# Altium PCB PCB1.PcbDoc
Units mm, origin at the board's own origin, x right, y up, seen from the top; angles counter-clockwise.
Board outline 58.42 x 106.68 mm, 2 copper layers (Top Layer, Bottom Layer); 57 components, 47 nets, 185 pads, 8 vias.
Unrouted connection lines stored in the file: 18.
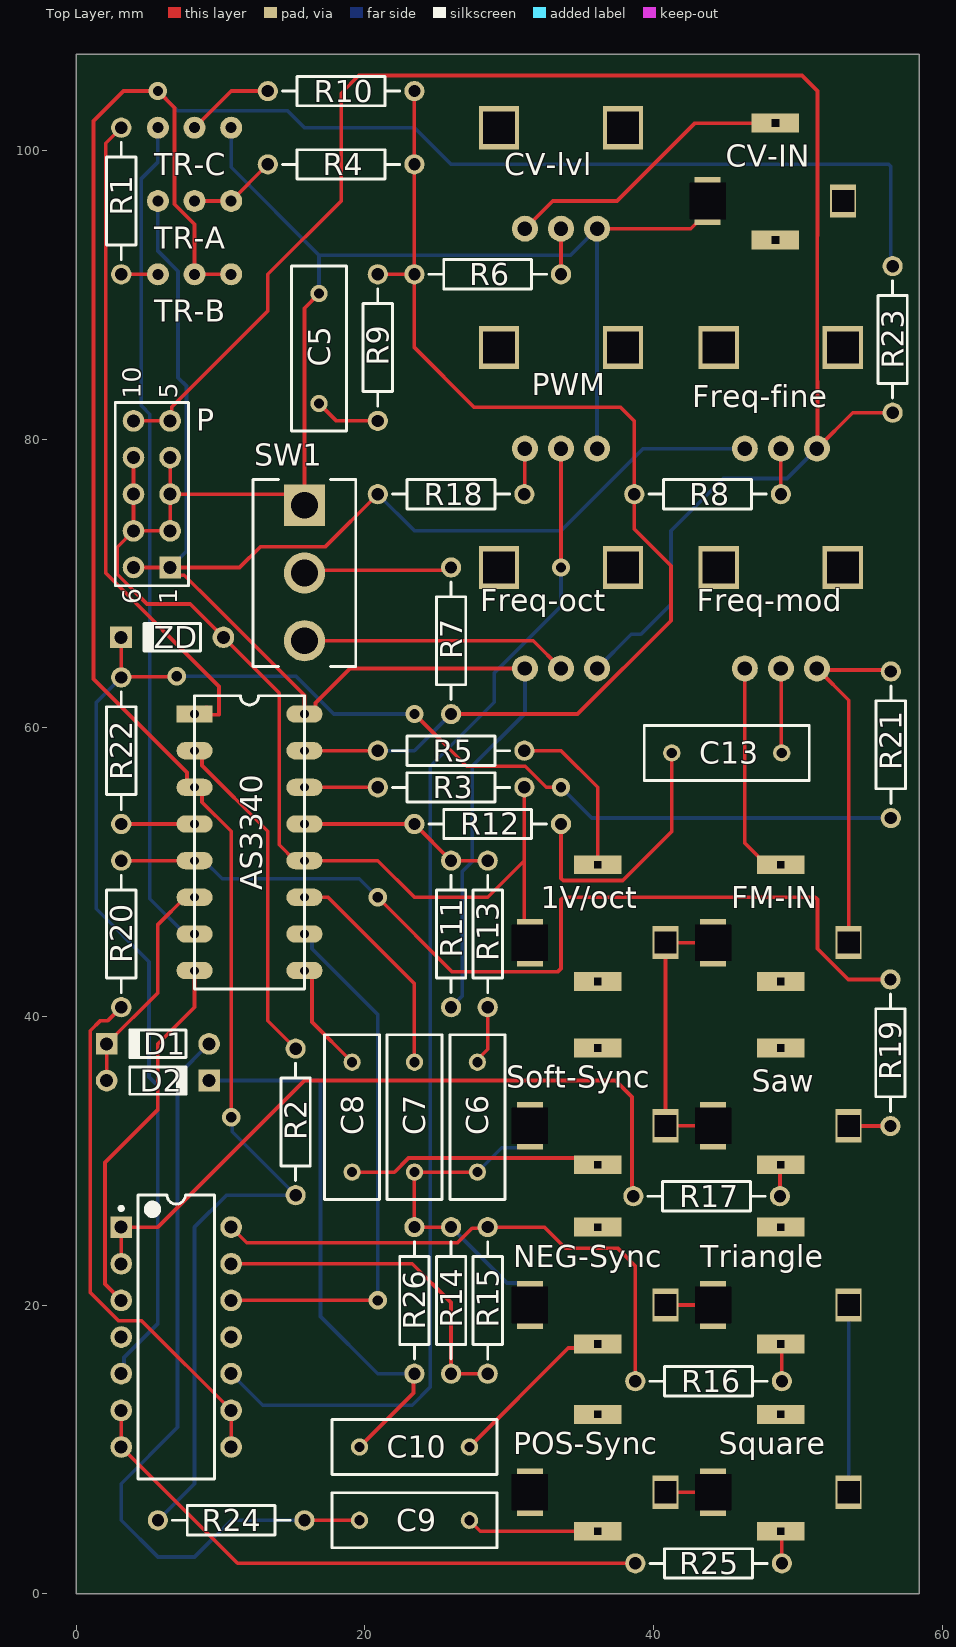
[diagram p0: Top Layer view]
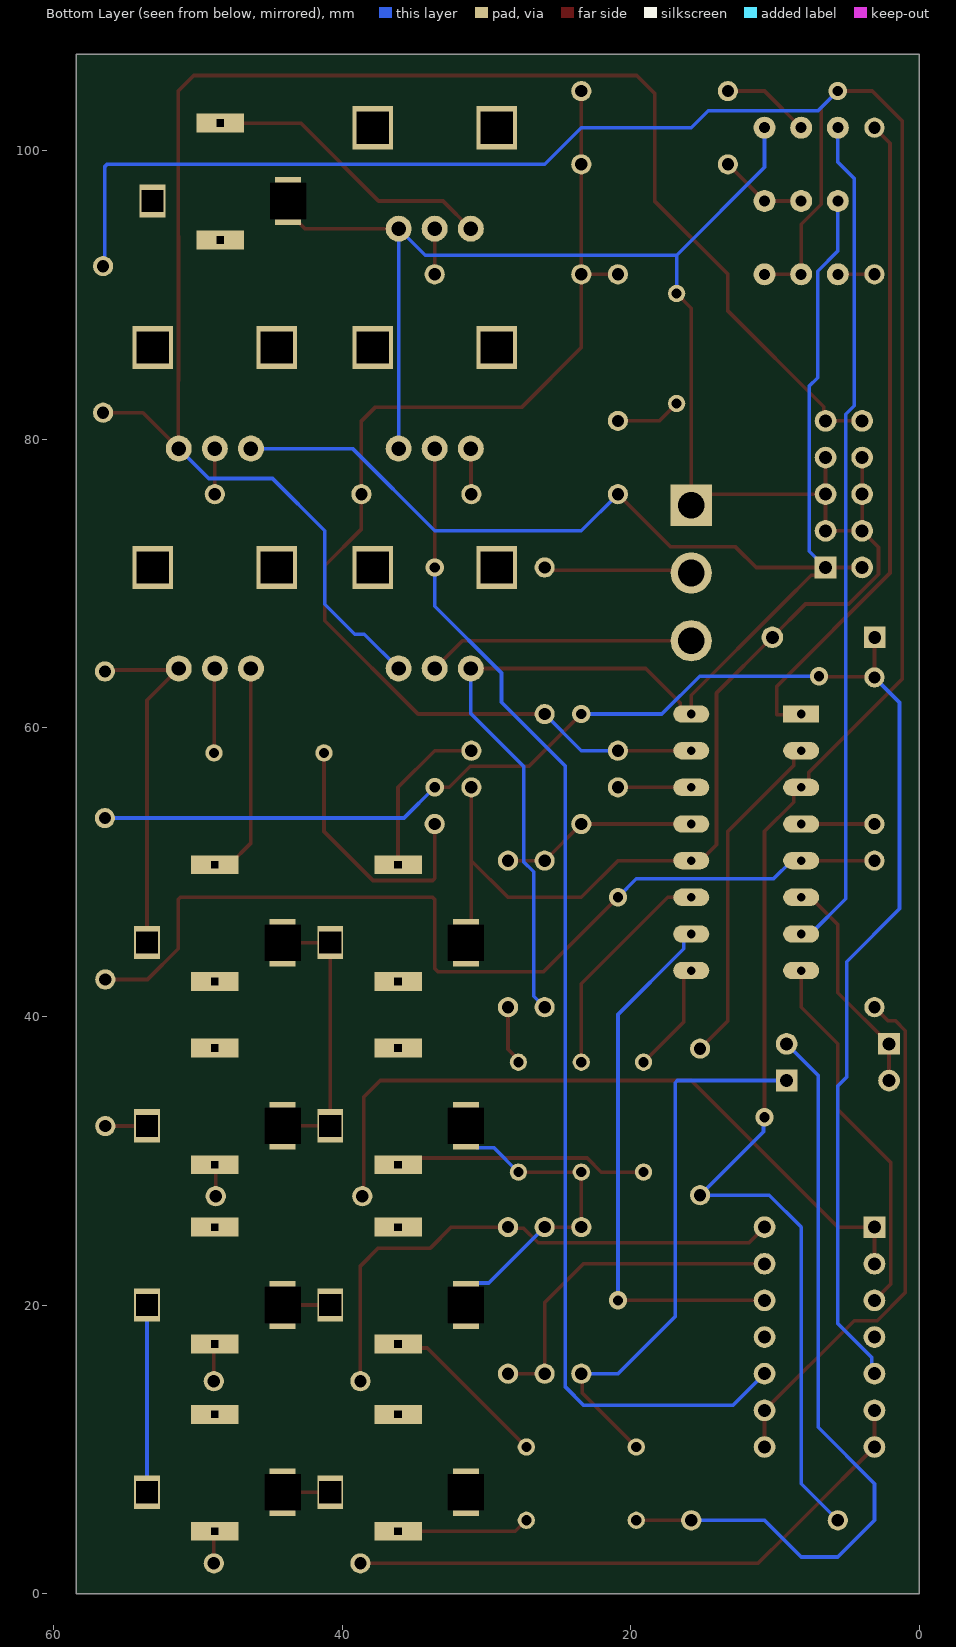
[diagram p1: Bottom Layer view, seen from below]

## Layer stack, top to bottom
Top Solder: solder mask 0.0102, Solder Resist, Dk 3.5
Top Layer: signal copper 0.0356
Dielectric 1: dielectric 0.32, FR-4, Dk 4.8
Bottom Layer: signal copper 0.0356
Bottom Solder: solder mask 0.0102, Solder Resist, Dk 3.5

## Board outline
0,0 58.42,0 58.42,106.68 0,106.68

## Design rules (kind name [scope] priority, off if disabled: settings)
Clearance [All] p1: gap=0.254 ignorepadtopadclearanceinfootprint=FALSE except(0: Arc-Hole Track-Hole SMDPad-Hole THPad-Hole Via-Hole Fill-Hole Poly-Hole Region-Hole Text-Hole)
PolygonConnect [All] p1: connectstyle=Relief reliefconductorwidth=0.254 reliefentries=4 polygonreliefangle="90 Angle" airgapwidth=0.254
RoomDefinition VCO_schematic [InComponentClass('VCO_schematic')] p1: confinementstyle=ConfineIn formatcopy=TRUE lockcomponents=FALSE outline 0,0 58.42,0 58.42,106.68 0,106.68
RoutingVias [All] p1: holewidth=0.711 width=1.27 viastyle="Through Hole" minholewidth=0.711 minwidth=1.27 maxholewidth=0.711 maxwidth=1.27
SolderMaskExpansion [All] p1: expansion=0.102 istentingtop=FALSE
Width [All] p1: maxlimit=0.254 minlimit=0.254 preferedwidth=0.254
30 further rules are at their usual default settings.

## Classes and differential pairs
component class VCO_schematic: 0 1V/oct AS3340 C5 C6 C7 C8 C9 C10 C13 CV-lvl D1 D2 FM-IN Freq-fine Freq-mod Freq-oct NEG-Sync P POS-Sync PWM R1 R2 R3 R4 R5 R6 R7 R8 R9 R10 R11 R13 R14 R15 R16 R17 R18 R19 R20 R21 R22 R23 R24 R25 R26 Saw Soft-Sync Square SW1 TR-A TR-B TR-C Triangle

## Components (designator, comment, footprint, x,y, rotation, side; value= is the part's Value field where it differs from the comment)
1V/oct "" PCBComponent_1#1 36.127,45.72 r0 top (schematic designator 1V/oct-IN)
AS3340 "AS3340" DIP16-AS3340 8.187,60.96 r0 top (schematic designator *)
C5 "" RAD-0.3 16.817,86.293 r90 top value=10nF
C6 "" RAD-0.3 27.79,33.02 r270 top value=10nF
C7 "(styrene)" RAD-0.3 23.427,33.02 r270 top value=1nF
C8 "" RAD-0.3 19.109,33.02 r270 top value=1nF
C9 "" RAD-0.3 23.427,5.08 r180 top value=1nF
C10 "" RAD-0.3 23.427,10.16 r180 top value=1nF
C13 "" RAD-0.3 45.075,58.271 r0 top value=100nF
CV-IN "" PCBComponent_1#1 48.447,97.12 r0 top
CV-lvl "VR-5" PCBComponent_1#2 33.587,101.6 r0 top value=100K
D1 "1N4148" DO-35 5.647,38.1 r180 top
D2 "1N4148" DO-35 5.647,35.56 r0 top
FM-IN "" PCBComponent_1#1 48.827,45.72 r0 top
Freq-fine "VR-2" PCBComponent_1#2 48.827,86.36 r0 top value=100K
Freq-mod "VR-3" PCBComponent_1#2 48.827,71.12 r0 top value=100K
Freq-oct "VR-1" PCBComponent_1#2 33.587,71.12 r0 top value=100K
NEG-Sync "" PCBComponent_1#1 36.127,20.6 r0 top (schematic designator NEG-Hard-Sync-IN)
P "power-header" HDR2X5_CEN 6.498,71.12 r90 top
POS-Sync "" PCBComponent_1#1 36.127,7.62 r0 top (schematic designator POS-Hard-Sync-IN)
PWM "VR-4" PCBComponent_1#2 33.587,86.36 r0 top value=100K
R1 "" AXIAL-0.4 3.107,96.52 r90 top value=24K
R2 "" AXIAL-0.4 15.195,32.69 r90 top value=5K6
R3 "" AXIAL-0.4 25.967,55.88 r0 top value=1K8
R4 "" AXIAL-0.4 18.347,99.06 r180 top value=200K
R5 "" AXIAL-0.4 25.967,58.42 r0 top value=100K
R6 "" AXIAL-0.4 28.507,91.44 r0 top value=100K
R7 "" AXIAL-0.4 25.967,66.04 r90 top value=300K
R8 "" AXIAL-0.4 43.747,76.2 r0 top value=3M3
R9 "" AXIAL-0.4 20.887,86.36 r270 top value=470R
R10 "" AXIAL-0.4 18.347,104.14 r0 top value=1M
R11 "" AXIAL-0.4 25.967,45.72 r270 top value=1M5
R12 "" AXIAL-0.4 28.507,53.34 r0 top value=1M
R13 "" AXIAL-0.4 28.507,45.72 r270 top value=470R
R14 "" AXIAL-0.4 25.967,20.32 r270 top value=100K
R15 "" AXIAL-0.4 28.507,20.32 r90 top value=100K
R16 "" AXIAL-0.4 43.817,14.719 r0 top value=1K
R17 "" AXIAL-0.4 43.683,27.541 r180 top value=1K
R18 "" AXIAL-0.4 25.967,76.2 r0 top value=47K
R19 "" AXIAL-0.4 56.42,37.484 r90 top value=470K
R20 "" AXIAL-0.4 3.107,45.72 r90 top value=470K
R21 "" AXIAL-0.4 56.447,58.832 r90 top value=47K
R22 "" AXIAL-0.4 3.107,58.42 r270 top value=2K
R23 "" AXIAL-0.4 56.573,86.925 r90 top value=680R
R24 "" AXIAL-0.4 10.727,5.08 r0 top value=10K
R25 "" AXIAL-0.4 43.817,2.094 r180 top value=1K
R26 "" AXIAL-0.4 23.427,20.32 r90 top value=10K
Saw "" PCBComponent_1#1 48.827,33.02 r0 top (schematic designator Saw-OUT)
Soft-Sync "" PCBComponent_1#1 36.127,33.02 r0 top (schematic designator Soft-Sync-IN)
Square "" PCBComponent_1#1 48.827,7.62 r0 top (schematic designator Square-OUT)
SW1 "A101SYCB04" FP-A101SYCB04-MFG 15.807,70.739 r0 top
TR-A "100K" PCBComponent_1#3 8.187,96.52 r270 top
TR-B "10K" PCBComponent_1#3 8.187,91.44 r90 top
TR-C "10K" PCBComponent_1#3 8.187,101.6 r90 top
Triangle "" PCBComponent_1#1 48.827,20.6 r0 top (schematic designator Triangle-OUT)
ZD "Zener" DO-35 6.638,66.281 r180 top (schematic designator D3)
? "TL074CN" N0014A 6.917,17.78 r0 top

## Footprints (in the part's own frame and the unit in brackets; to place one, negate y for a bottom-side part, rotate by r counter-clockwise, add the part's x,y. Pads: shape width x height; smd on the part's side, far side on the other; paste and mask are expansions set on the pad)
AXIAL-0.4 [mm] "Axial Device, Thru-Hole; 2 Leads; 0.4 in Pin Spacing"
  round 1.4 hole 0.85: 1(-5.08,0) 2(5.08,0)
  silkscreen extent -4.06,-1.02 4.06,1.02
DIP16-AS3340 [mm]
  rect 2.5x1.2 hole 0.6: 1(0,0)
  oval 2.5x1.2 hole 0.6: 2(0,-2.54) 3(0,-5.08) 4(0,-7.62) 5(0,-10.16) 6(0,-12.7) 7(0,-15.24) 8(0,-17.78) 9(7.62,-17.78) 10(7.62,-15.24) 11(7.62,-12.7) 12(7.62,-10.16) 13(7.62,-7.62) 14(7.62,-5.08) 15(7.62,-2.54) 16(7.62,0)
  silkscreen extent 0,-19.05 7.62,1.27
DO-35 [mm] "Diode, Axial; Body 3.8 x 1.9 mm (LxDia. max), Lead Dia. 0.53 mm (max)"
  round 1.5 hole 0.9: 1(-3.55,0)
  rect 1.5x1.5 hole 0.9: 2(3.55,0)
  silkscreen extent -1.95,-0.95 2.05,0.95
FP-A101SYCB04-MFG [mil]
  rect 112.37x112.37 hole 73 paste-39370.1 mask+0: 1(0,185)
  round 112.37 hole 73 paste-39370.1 mask+0: 2(0,0) 3(0,-185)
  silkscreen extent -140,-255 140,255, body extent -144,-259 144,259, height 10
HDR2X5_CEN [mm] "Connector; Header; 5x2 Position"
  rect 1.5x1.5 hole 0.9: 1(0,0)
  round 1.5 hole 0.9: 2(2.54,0) 3(5.08,0) 4(7.62,0) 5(10.16,0) 6(0,2.54) 7(2.54,2.54) 8(5.08,2.54) 9(7.62,2.54) 10(10.16,2.54)
  silkscreen extent -1.27,-1.27 11.43,3.81
N0014A [mm] "DIP, 14-Leads, Body 19.7x6.6mm, Pitch 2.54mm"
  rect 1.5x1.5 hole 0.9: 1(-3.81,7.62)
  round 1.5 hole 0.9: 2(-3.81,5.08) 3(-3.81,2.54) 4(-3.81,0) 5(-3.81,-2.54) 6(-3.81,-5.08) 7(-3.81,-7.62) 8(3.81,-7.62) 9(3.81,-5.08) 10(3.81,-2.54) 11(3.81,0) 12(3.81,2.54) 13(3.81,5.08) 14(3.81,7.62)
  silkscreen extent -3.93,-9.85 2.65,9.85, body extent -3.95,-9.85 3.95,9.85, height 5.08
PCBComponent_1#1 [mm]
  rect 3.3x1.3 hole 0.5 square: 2(0,-3.3) 2(0,4.8)
  rect 1.8x3.3 hole 2.5 square: 4(-4.7,-0.6)
  rect 1.8x2.3 hole 1.5 square: 4(4.7,-0.6)
PCBComponent_1#2 [mm]
  round 1.8 hole 1: 1(-2.5,-7) 2(2.5,-7) 3(0,-7)
  rect 2.8x3 hole 2.2 square: 5(-4.3,0) 5(4.3,0)
PCBComponent_1#3 [mm]
  round 1.524 hole 0.762: 1(0,-2.54) 2(0,0) 3(0,2.54)
RAD-0.3 [mm] "Radial Cap, Thru-Hole; 2 Leads; 0.3 in Pin Spacing"
  round 1.2 hole 0.7: 1(-3.81,0) 2(3.81,0)
  silkscreen extent -5.71,-1.91 5.71,1.91

## Part data
1V/oct CV-IN FM-IN NEG-Sync POS-Sync Saw Soft-Sync Square Triangle: library part Phonejack2, "Jack Socket, 1/4\" [6.5mm], Thru-Hole, Vertical, 2-Conductor Open Circuit", PackageDocument=2003, ComponentLink1Description="Manufacturer Link", ComponentLink1URL=http://www.cliffuk.co.uk/, DatasheetDocument=2003, DrillAndSlotSize="Corresponds to nominal value.", LatestRevisionDate=15-Jul-2004, LatestRevisionNote="Component Replaced.", PackageReference=S1VS_SNS, PCB_Layout="Complies with manufacturer's recommendation.", Publisher="Altium Limited"
C5 C6 C7 C8 C9 C10 C13: library part Cap, "Capacitor", LatestRevisionDate=17-Jul-2002, LatestRevisionNote="Re-released for DXP Platform.", PackageDescription="Radial Cap, Thru-Hole; 2 Leads; 0.3 in Pin Spacing", PackageReference=RAD-0.3, Published=8-Jun-2000, Publisher="Altium Limited"
CV-lvl Freq-fine Freq-mod Freq-oct PWM: library part RPot, "Potentiometer", LatestRevisionDate=17-Jul-2002, LatestRevisionNote="Re-released for DXP Platform.", PackageDescription="Variable Resistor, Thru-Hole; 3 Leads", PackageReference=VR5, Published=8-Jun-2000, Publisher="Altium Limited", Set Position=0.5, Sim Note="Enter the Resistance value and the set point into parameter fields."
D1 D2 ZD: library part "Diode 1N4148", "High Conductance Fast Diode", Code_JEDEC=DO-204-AH, ComponentLink1Description="Manufacturer Link", ComponentLink1URL=http://www.fairchildsemi.com/, ComponentLink2Description=Datasheet, ComponentLink2URL=http://www.fairchildsemi.com/ds/1N%2F1N4148.pdf, DatasheetVersion=1997, LatestRevisionDate=17-Jul-2002, LatestRevisionNote="Re-released for DXP Platform.", PackageDescription="Diode, Axial; Body 3.8 x 1.9 mm (LxDia. max), Lead Dia. 0.53 mm (max)", PackageReference=DO-35, Published=8-Jun-2000, Publisher="Altium Limited"
P: library part "Header 5X2A", "Header, 5-Pin, Dual row", LatestRevisionDate=17-Jul-2002, LatestRevisionNote="Re-released for DXP Platform.", Publisher="Altium Limited"
R1 R2 R3 R4 R5 R6 R7 R8 R9 R10 R11 R12 R13 R14 R15 R16 R17 R18 R19 R20 R21 R22 R23 R24 R25 R26: library part Res2, "Resistor", LatestRevisionDate=17-Jul-2002, LatestRevisionNote="Re-released for DXP Platform.", PackageDescription="Axial Device, Thru-Hole; 2 Leads; 0.4 in Pin Spacing", PackageReference=AXIAL-0.4, Published=8-Jun-2000, Publisher="Altium Limited"
SW1: library part CMP-03408-000017-1, "SWITCH TOGGLE SPDT 0.4VA 20V", Actuator Color=Chrome, Contact Current Rating=400mA, Contact Resistance=10mR, Flammability Rating="UL94 V-1", Insulation Resistance=30MR, Max Operating Temperature=85°C, Max Voltage Rating (AC)=20V, Min Operating Temperature=-30°C, Package Quantity=100, Power Rating=400mW, Actuator Length=10.41mm, Actuator Material=Phenolic, Actuator Type="Standard Round", Contact Material=Copper, Contact Plating=Gold, Depth=6.86mm, Electrical Life=6000Cycles, ELV=Compliant, Illumination Type=Non-Illuminated, Lead Free="Lead Free", Max Voltage Rating (DC)=20V, Mount=Panel, Number of Poles=1, Number of Positions=2, Orientation=Straight, Packaging=Bulk, Radiation Hardening=No, REACH SVHC="No SVHC", RoHS Compliant=Yes, Series="Gemini A", Switch Function=On-On, Termination="PC Pins", Throw Configuration=SPDT, Voltage Rating (AC)=20V, Voltage Rating (DC)=20V
TR-A TR-B TR-C: library part "RPot SM", "Square Trimming Potentiometer", ComponentLink1Description="Manufacturer Link", ComponentLink1URL=http://bourns.com/2/search.html, DatasheetVersion=Oct-2003, PackageDescription="Square Trimming Potentiometer", PackageReference=POT4MM-2, Published=17-Dec-2003, Publisher="Altium Limited"
?: library part CMP-0015-00129-2, "Quad Low-Noise JFET-Input General-Purpose Operational Amplifier, 7 to 36 V, 0 to 70 degC, 14-pin DIP (N14), Pb-Free (RoHS)", Manufacturer="Texas Instruments", Rating=Military, Total Supply Voltage(Max)(+5V is 5, +/-5V is 10)=36, Total Supply Voltage(Min)(+5V is 5, +/-5V is 10)=7, CMRR(Min)(dB)=70, Code_JEDEC=MS-001, ComponentLink1Description="Manufacturer URL", ComponentLink1URL=http://www.ti.com/, ComponentLink2Description=Datasheet, ComponentLink2URL=http://www.ti.com/lit/ds/symlink/tl074.pdf, ComponentLink3Description="Package Specification", ComponentLink3URL=http://www.ti.com/lit/ml/mpdi002c/mpdi002c.pdf, DatasheetVersion=SLOS080J, Eco-Plan="Pb-Free (RoHS)", GBW(Typ)(MHz)=3, IIB(Max)(pA)=200, Iq per channel(Max)(mA)=2.5, Mounting Technology="Through Hole", Number of Channels=4, Offset Drift(Typ)(uV/C)=18, PackageDescription="14-Pin Plastic In-Line, Body 19.305 x 6.35 mm, Pitch 2.54 mm", PackageReference=N0014A, PackageVersion="4040049/E, 12/2002", PartNumber=TL074CN, Slew Rate(Typ)(V/us)=13, Sub Family="General Purpose Amplifier, High Supply Voltage Amplifier (>=30V)", Vio (25C)(Max)(mV)=10, Vn at 1kHz(Typ)(nV/rtHz)=18

## Via types
v1: diameter 1.27, hole 0.711, Top Layer to Bottom Layer, 8 vias

## Nets (pads, with @x,y where several pads share a name; then routed paths per layer and width w, separated by ;. In a path a pad name is that pad's centre, name@x,y a point inside that pad or via, vN(x,y) a via of type N, cw(c..) or ccw(c..) an arc to the next point about the centre after c; other vN are vias at no path point)
"+ 12V": AS3340.16 Freq-fine.1 Freq-oct.1 P.1 P.6 R11.2 R18.1 TR-A.1 | length 131
  Top Layer w0.254: P.6 P.1 P.1@6.948,71.12 ; R18.1 17.234,72.547 12.736,72.547 11.309,71.12 P.1@6.948,71.12 ; Freq-oct.1 18.967,64.12 16.571,61.725 16.571,61.397 16.134,60.96 AS3340.16 15.807,62.261 9.445,68.623 7.48,70.588 7.121,70.588 6.948,70.761 P.1@6.948,71.12
  Bottom Layer w0.254: TR-A.1 5.647,93.056 7.044,91.659 7.044,84.278 7.629,83.693 7.629,72.251 P.1 ; R18.1 23.427,73.66 33.587,73.66 39.287,79.36 Freq-fine.1 ; R11.2 26.731,41.404 26.731,50.036 27.426,50.73 27.426,57.339 31.087,61 Freq-oct.1
"- 12V": Freq-fine.2 Freq-oct.2 P.5 P.10 R23.1 | length 119.7
  Top Layer w0.254: P.10 P.5 6.618,81.4 6.618,82.251 13.267,88.9 13.267,91.44 18.347,96.52 18.347,103.991 19.577,105.221 50.286,105.221 51.367,104.14 51.367,94.109 51.346,94.088 51.346,84.056 51.367,84.035 Freq-fine.2@51.367,79.4 ; Freq-fine.2 Freq-fine.2@51.367,79.4 ; R23.1 53.812,81.845 Freq-fine.2@51.367,79.4
  Bottom Layer w0.254: Freq-oct.2 38.465,66.498 39.125,66.498 41.207,68.58 41.207,73.66 44.828,77.281 49.248,77.281 Freq-fine.2
Net1V/oct-IN_1: 1V/oct.2 R5.2 | length 11.5
  Top Layer w0.254: R5.2 33.587,58.42 36.127,55.88 1V/oct.2@36.127,50.52
Net1V/oct-IN_5: 1V/oct.4 AS3340.12 C5.2 C6.2 C7.2 CV-IN.4 CV-lvl.2 FM-IN.4 Freq-mod.2 NEG-Sync.4 P.2 P.3 P.4 P.7 P.8 P.9 POS-Sync.4 PWM.2 R3.2 R14.1 R19.1 R21.2 R26.2 Saw.4 Soft-Sync.4 Square.4 SW1.1 TR-C.1 Triangle.4 ZD.1 | length 245.7
  Top Layer w0.254: P.9 P.8 P.7 ; P.4 P.3 ; C5.2 15.807,89.093 SW1.1 15.045,76.2 P.3 ; R14.1 R26.2 C7.2 C6.2 ; R3.2 31.047,50.8 ; 1V/oct.4@31.427,45.12 31.047,45.5 31.047,50.8 ; CV-lvl.2 42.577,94.6 43.747,95.77 CV-IN.4@43.747,96.52 ; POS-Sync.4@40.827,7.02 Square.4@44.127,7.02 ; NEG-Sync.4@40.827,20 Triangle.4@44.127,20 ; Saw.4@44.127,32.42 40.827,32.42 40.827,45.12 FM-IN.4@44.127,45.12 ; Freq-mod.2 Freq-mod.2@51.431,64.016 ; Saw.4@53.527,32.42 53.543,32.404 R19.1 ; FM-IN.4@53.527,45.12 53.527,61.92 Freq-mod.2@51.431,64.016 ; R21.2 56.343,64.016 Freq-mod.2@51.431,64.016 ; P.7 2.827,72.529 2.827,70.652 4.893,68.585 7.883,68.585 ZD.1 14.057,62.411 14.057,51.899 15.157,50.8 20.887,50.8 23.427,48.26 28.507,48.26 31.047,50.8 ; P.7 P.2 P.3
  Bottom Layer w0.254: TR-C.1 10.727,98.853 16.817,92.763 ; C5.2 16.817,92.763 ; R14.1 29.844,21.523 30.654,21.523 31.427,20.75 NEG-Sync.4@31.427,20 ; C6.2 29.477,30.897 30.654,30.897 31.427,31.67 Soft-Sync.4@31.427,32.42 ; PWM.2 CV-lvl.2 34.25,92.763 16.817,92.763 ; Square.4@53.527,7.02 Triangle.4@53.527,20
Net*_1: AS3340.1 R1.2 | length 47.1
  Top Layer w0.254: R1.2 2.026,100.519 2.026,70.734 9.888,62.872 9.888,60.91 8.236,60.91 AS3340.1 8.546,60.96 AS3340.1@9.019,61.433
Net*_2: AS3340.2 R2.2 | length 23.6
  Top Layer w0.254: AS3340.2 8.273,58.42 8.71,57.983 8.71,57.394 13.267,52.837 13.267,39.698 R2.2
Net*_3: AS3340.3 R2.1 R23.2 R24.1 TR-B.1 TR-B.2 | length 191.2
  Top Layer w0.254: v1(10.727,33.02) 10.727,52.837 8.71,54.854 8.71,55.443 8.273,55.88 AS3340.3 8.101,55.88 7.664,56.317 7.664,56.906 1.186,63.383 1.186,102.071 3.256,104.14 v1(5.647,104.14) 6.795,102.992 6.795,96.295 8.187,94.904 TR-B.2 TR-B.1
  Bottom Layer w0.254: R24.1 8.187,7.62 8.187,25.4 10.397,27.61 R2.1 10.801,32.004 10.801,32.946 v1(10.727,33.02) ; v1(5.647,104.14) 7.014,102.773 14.634,102.773 15.807,101.6 23.427,101.6 25.967,99.06 56.298,99.06 56.447,98.911 56.447,92.131 R23.2
Net*_4: AS3340.4 R22.2 | length 5.1
  Top Layer w0.254: R22.2 AS3340.4
Net*_5: AS3340.5 R19.2 R20.2 | length 65.8
  Top Layer w0.254: R20.2 AS3340.5 ; v1(20.887,48.26) 26.058,43.089 33.347,43.089 33.587,43.329 33.587,48.111 33.736,48.26 51.218,48.26 51.367,48.111 51.367,44.691 53.494,42.564 R19.2
  Bottom Layer w0.254: AS3340.5 8.837,50.8 10.1,49.537 19.61,49.537 v1(20.887,48.26)
Net*_6: AS3340.6 D1.2 D2.1 | length 15.6
  Top Layer w0.254: D2.1 D1.2 5.647,41.65 5.647,46.37 7.537,48.26 AS3340.6
Net*_7: AS3340.7 TR-C.3 | length 58.3
  Bottom Layer w0.254: TR-C.3 5.647,99.223 4.504,98.08 4.504,82.333 5.089,81.748 5.089,48.168 7.537,45.72 AS3340.7
Net*_8: ?.3 AS3340.8 | length 25.9
  Top Layer w0.254: ?.3 1.976,21.451 1.976,29.877 5.647,33.548 5.647,38.1 8.187,40.64 AS3340.8
Net*_9: AS3340.9 C8.1 | length 7.8
  Top Layer w0.254: AS3340.9 15.893,43.18 16.33,42.743 16.33,39.609 C8.1
Net*_10: ?.12 AS3340.10 | length 37.7
  Top Layer w0.254: ?.12 v1(20.887,20.32)
  Bottom Layer w0.254: AS3340.10 15.893,45.72 16.33,45.283 16.33,44.694 20.887,40.137 v1(20.887,20.32)
Net*_11: AS3340.11 C7.1 | length 15.5
  Top Layer w0.254: AS3340.11 17.438,48.26 23.427,42.271 C7.1
Net*_13: AS3340.13 R11.1 R12.1 R13.1 | length 13.8
  Top Layer w0.254: AS3340.13 R12.1 R11.1 R13.1
Net*_14: AS3340.14 R3.1 | length 5.1
  Top Layer w0.254: AS3340.14 R3.1
Net*_15: AS3340.15 R4.1 R5.1 R6.1 R7.1 R8.1 R9.1 R10.2 | length 81.7
  Top Layer w0.254: AS3340.15 R5.1 ; R9.1 R6.1 ; R10.2 R4.1 R6.1 ; R7.1 34.738,60.96 41.207,67.428 41.207,71.239 38.667,73.779 R8.1 38.667,81.28 37.733,82.214 27.573,82.214 23.427,86.36 R6.1
  Bottom Layer w0.254: R5.1 23.427,58.42 R7.1
Net_1: ?.1 ?.2 R17.2 | length 49.8
  Top Layer w0.254: ?.2 3.107,24.892 ?.1@3.615,25.4 ; ?.1 ?.1@3.615,25.4 ; R17.2 38.51,27.633 38.51,34.419 37.369,35.56 15.807,35.56 5.647,25.4 ?.1@3.615,25.4
Net_5: ?.5 R21.1 R22.1 ZD.2 | length 112
  Top Layer w0.254: ZD.2 3.107,66.262 R22.1 3.148,63.541 6.906,63.541 v1(6.947,63.582) ; v1(23.427,60.96) 27.048,57.339 31.117,57.339 32.571,55.885 33.582,55.885 v1(33.587,55.88)
  Bottom Layer w0.254: ?.5 3.297,15.43 3.297,16.371 5.647,18.721 5.647,35.179 5.027,35.799 5.027,43.8 1.366,47.461 1.366,61.759 R22.1 ; v1(6.947,63.582) 15.222,63.582 17.844,60.96 v1(23.427,60.96) ; v1(33.587,55.88) 35.715,53.752 R21.1
Net_6: ?.6 ?.7 R25.2 | length 41.5
  Top Layer w0.254: ?.6 ?.7 7.663,5.604 9.156,4.11 11.173,2.094 R25.2
Net_8: ?.8 ?.9 R20.1 | length 36.6
  Top Layer w0.254: R20.1 2.181,39.714 1.672,39.714 0.966,39.008 0.966,20.862 2.916,18.911 4.516,18.911 ?.9 ?.8
Net_10: ?.10 PWM.3 | length 84
  Top Layer w0.254: v1(33.587,71.12) PWM.3
  Bottom Layer w0.254: ?.10 12.908,13.059 23.278,13.059 24.529,14.31 24.529,57.341 28.961,61.773 28.961,63.805 33.587,68.432 v1(33.587,71.12)
Net_13: ?.13 R14.2 R15.1 | length 23.8
  Top Layer w0.254: ?.13 23.278,22.86 25.967,20.171 R14.2 R15.1
Net_14: ?.14 R15.2 R16.1 | length 38
  Top Layer w0.254: ?.14 11.808,24.319 26.414,24.319 27.426,25.33 28.437,25.33 R15.2 32.432,25.4 33.886,23.946 37.502,23.946 38.737,22.711 R16.1
NetC5_1: C5.1 R9.2 | length 4.6
  Top Layer w0.254: C5.1 18.02,81.28 R9.2
NetC6_1: C6.1 R13.2 | length 4.1
  Top Layer w0.254: C6.1 27.79,37.002 28.507,37.719 R13.2
NetC8_2: C8.2 Soft-Sync.2 | length 17.6
  Top Layer w0.254: C8.2 22.039,29.21 23.02,30.191 35.656,30.191 Soft-Sync.2@36.127,29.72
NetC9_1: C9.1 POS-Sync.2 | length 9.2
  Top Layer w0.254: C9.1 27.997,4.32 POS-Sync.2@36.127,4.32
NetC9_2: C9.2 D1.1 R24.2 | length 54.2
  Top Layer w0.254: R24.2 C9.2
  Bottom Layer w0.254: D1.1 7.009,35.912 7.009,11.522 3.107,7.62 3.107,5.08 5.647,2.54 8.187,2.54 10.727,5.08 R24.2
NetC10_1: C10.1 NEG-Sync.2 | length 11.7
  Top Layer w0.254: C10.1 34.097,17.02 NEG-Sync.2@36.127,17.02
NetC10_2: C10.2 D2.2 R26.1 | length 38.8
  Top Layer w0.254: C10.2 23.36,13.903 23.36,15.173 R26.1
  Bottom Layer w0.254: D2.2 16.769,35.56 16.918,35.411 16.918,19.209 20.887,15.24 R26.1
NetC13_1: C13.1 R12.2 | length 18.4
  Top Layer w0.254: R12.2 33.587,49.569 33.736,49.421 37.866,49.421 41.265,52.819 C13.1
NetC13_2: C13.2 Freq-mod.3 | length 5.9
  Top Layer w0.254: Freq-mod.3 48.856,64.091 48.856,58.3 C13.2
NetCV-IN_1: CV-IN.2 CV-lvl.1 | length 20.4
  Top Layer w0.254: CV-lvl.1 33.007,96.52 37.474,96.52 42.874,101.92 CV-IN.2@48.447,101.92
NetCV-lvl_3: CV-lvl.3 R6.2 | length 3.2
  Top Layer w0.254: R6.2 CV-lvl.3
NetFM-IN_1: FM-IN.2 Freq-mod.1 | length 15.2
  Top Layer w0.254: Freq-mod.1 46.327,52.02 47.827,50.52 FM-IN.2@48.827,50.52
NetFreq-fine_3: Freq-fine.3 R8.2 | length 3.2
  Top Layer w0.254: R8.2 Freq-fine.3
NetFreq-oct_3: Freq-oct.3 SW1.3 | length 18.6
  Top Layer w0.254: SW1.3 31.667,66.04 Freq-oct.3
NetPWM_1: PWM.1 R18.2 | length 3.2
  Top Layer w0.254: R18.2 31.067,76.22 31.067,79.34 PWM.1
NetR1_1: R1.1 TR-B.3 | length 2.5
  Top Layer w0.254: R1.1 TR-B.3
NetR4_2: R4.2 TR-A.2 TR-A.3 | length 6.1
  Top Layer w0.254: TR-A.2 TR-A.3 R4.2
NetR7_2: R7.2 SW1.2 | length 10.6
  Top Layer w0.254: SW1.2@15.616,70.929 SW1.2 15.997,70.929 25.776,70.929 R7.2
NetR10_1: R10.1 TR-C.2 | length 6.1
  Top Layer w0.254: TR-C.2 10.727,104.14 R10.1
NetR16_2: R16.2 Triangle.2 | length 2.6
  Top Layer w0.254: Triangle.2@48.827,17.3 48.897,17.23 R16.2
NetR17_1: R17.1 Saw.2 | length 2.2
  Top Layer w0.254: R17.1 48.763,29.656 Saw.2@48.827,29.72
NetR25_1: R25.1 Square.2 | length 2.3
  Top Layer w0.254: Square.2@48.827,4.32 48.897,4.25 R25.1
pads on no net: ?.4 ?.11 CV-lvl.5 Freq-fine.5 Freq-mod.5 Freq-oct.5 PWM.5

## Text inside footprints (layer, text, board x,y; h text height)
P: Top Overlay "6" at 4.466,68.58 h1.27 r90; Top Overlay "10" at 4.466,82.804 h1.27 r90; Top Overlay "5" at 7.006,82.804 h1.27 r90; Top Overlay "1" at 7.006,68.58 h1.27 r90